# Altium PCB PCB.PcbDoc
Units mm, origin at the board's own origin, x right, y up, seen from the top; angles counter-clockwise.
Board outline 160 x 80 mm, 2 copper layers (Top Layer, Bottom Layer); 109 components, 85 nets, 468 pads, 1213 vias.
Unrouted connection lines stored in the file: 1.
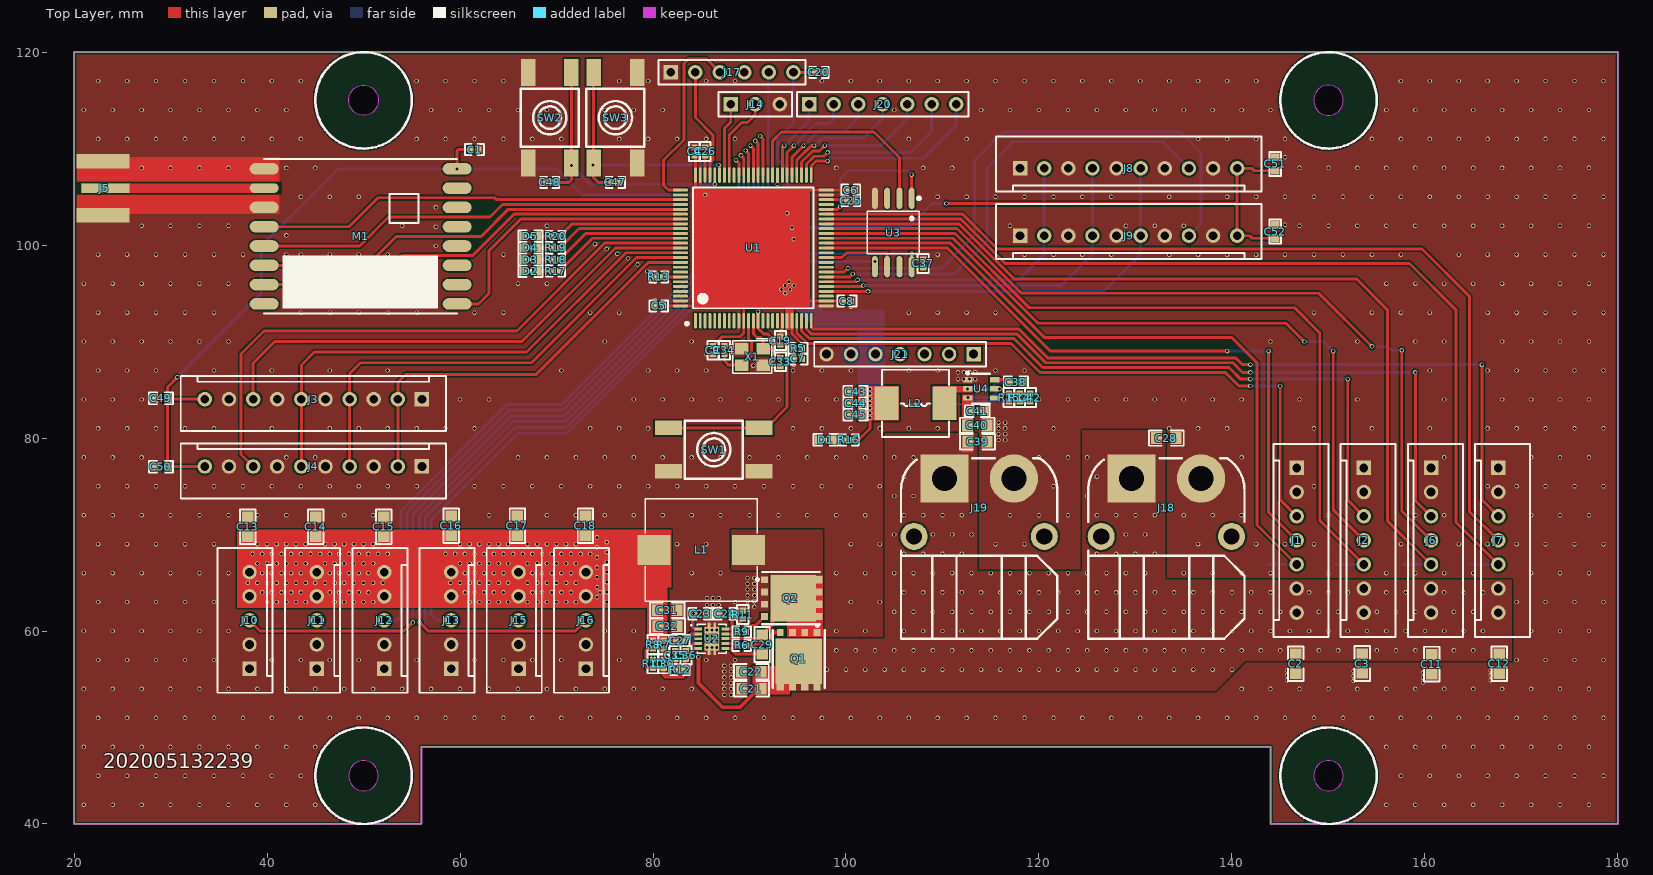
[diagram p0: Top Layer view]
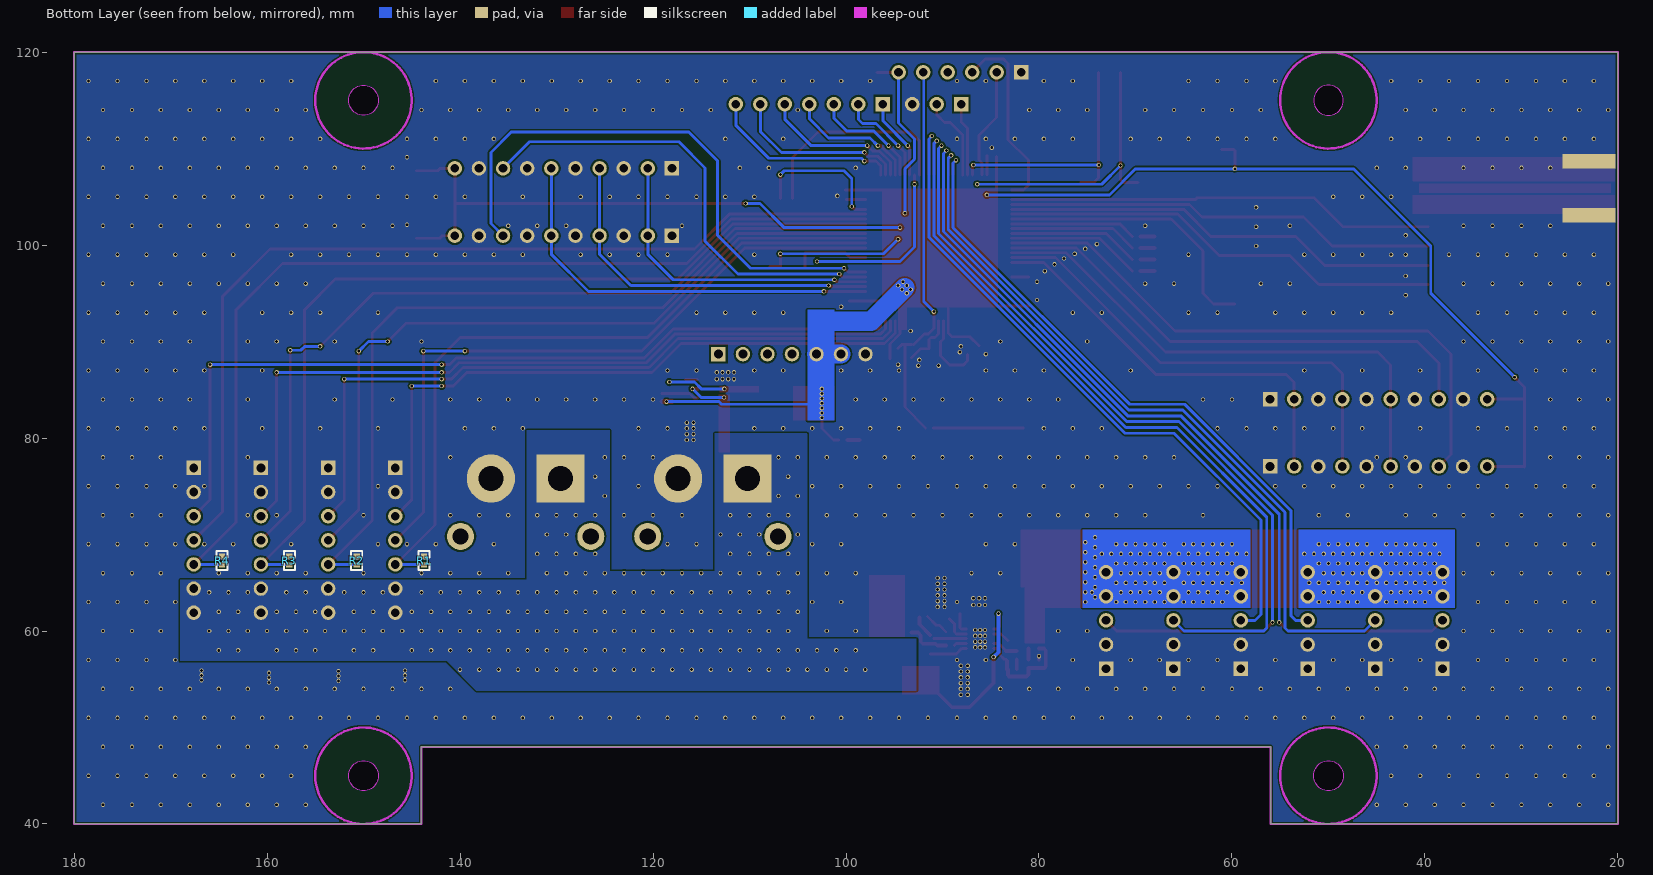
[diagram p1: Bottom Layer view, seen from below]

## Layer stack, top to bottom
Top Solder: solder mask 0.0102, Solder Resist, Dk 3.5
Top Layer: signal copper 0.0356
Dielectric 1: dielectric 0.32, FR-4, Dk 4.8
Bottom Layer: signal copper 0.0356
Bottom Solder: solder mask 0.0102, Solder Resist, Dk 3.5

## Board outline
20,40 20,120 180,120 180,40 144,40 144,48 56,48 56,40
cut-out: 148.45,45 ccw(c150,45) 150,43.45 ccw(c150,45) 151.55,45 ccw(c150,45) 150,46.55 ccw(c150,45)
cut-out: 148.45,115 ccw(c150,115) 150,113.45 ccw(c150,115) 151.55,115 ccw(c150,115) 150,116.55 ccw(c150,115)
cut-out: 48.45,45 ccw(c50,45) 50,43.45 ccw(c50,45) 51.55,45 ccw(c50,45) 50,46.55 ccw(c50,45)
cut-out: 50,113.45 cw(c50,115) 48.45,115 cw(c50,115) 50,116.55 cw(c50,115) 51.55,115 cw(c50,115)

## Design rules (kind name [scope] priority, off if disabled: settings)
AcuteAngle [All] p1: minimum=7.00000000000000E+0001 checktracksonly=FALSE
Clearance RF [InNetClass('RF') vs InNet('GND')] p1: gap=0.2
Clearance [All] p2: gap=0.15 except(0.1: Track-Track; 0.18: Arc-Via Via-Poly SMDPad-Via Track-Via Via-Fill THPad-Via Via-Via Via-Text; 0.2: THPad-Poly Arc-THPad THPad-Text SMDPad-THPad THPad-Fill Track-THPad THPad-THPad; 0.25: Region-Text; 0.5: Arc-Region Poly-Region THPad-Region Region-Region Text-Text Fill-Region SMDPad-Region Via-Region Track-Region)
ComponentClearance [All] p1: gap=0 collisioncheckmode=3 verticalgap=0 showdistances=FALSE
DiffPairsRouting [All] p1: maxlimit=0.254 minlimit=0.2 mostfreqgap=0.2 toplayer_minwidth=0.2 toplayer_maxwidth=0.381 toplayer_prefwidth=0.2 bottomlayer_minwidth=0.2 bottomlayer_maxwidth=0.381 bottomlayer_prefwidth=0.2 maxuncoupledlength=5
Height [All] p1: minheight=0 maxheight=254 prefheight=12.7
HoleSize [All] p1: absolutevalues=TRUE maxlimit=6.3 minlimit=0.2 maxpercent=80.000 minpercent=20.000
HoleToHoleClearance [All] p1: gap=0.2 allowstackedmicrovias=TRUE
MinimumSolderMaskSliver [All] p1: minsoldermaskwidth=0.089
PlaneConnect [All] p1: planeconnectstyle=Direct reliefexpansion=0.508 reliefentries=4 reliefconductorwidth=0.254 reliefairgap=0.254
PolygonConnect [All] p1: connectstyle=Direct reliefconductorwidth=0.254 reliefentries=4 polygonreliefangle="90 Angle" airgapwidth=0.254
RoutingVias [All] p1: holewidth=0.3 width=0.45 viastyle="Through Hole" minholewidth=0.3 minwidth=0.4 maxholewidth=0.711 maxwidth=1.27
SilkToBoardRegionClearance [All] p1 off:
SilkToSilkClearance [All] p1: silktosilkclearance=0
SilkToSolderMaskClearance [IsPad] p1: minsilkscreentomaskgap=0 clearancetoexposedcopper=TRUE
SolderMaskExpansion [All] p1: expansion=0.102
UnpouredPolygon [All] p1: allowunpoured=FALSE
UnpouredPolygon BoardOutlineClearance [All] p2: allowunpoured=FALSE
Width [All] p1: maxlimit=100 minlimit=0.13 preferedwidth=0.18
19 further rules are at their usual default settings.

## Classes and differential pairs
net class RF: NetJ5_1

## Components (designator, comment, footprint, x,y, rotation, side; value= is the part's Value field where it differs from the comment)
C1 "0.1uF" 0402 61.5,109.9 r180 top
C2 "10uF" 0805 146.6,56.6 r90 top
C3 "10uF" 0805 153.5,56.633 r90 top
C4 "0.1uF" 0402 84.3,109.7 r270 top
C5 "0.1uF" 0402 80.6,93.7 r0 top
C6 "0.1uF" 0402 100.5,105.7 r180 top
C7 "0.1uF" 0402 95.025,88.2 r0 top
C8 "0.1uF" 0402 100.1,94.2 r180 top
C9 "0.1uF" 0402 86.2,89.1 r90 top
C11 "10uF" 0805 160.7,56.567 r90 top
C12 "10uF" 0805 167.7,56.6 r90 top
C13 "10uF" 0805 38,70.8 r270 top
C14 "10uF" 0805 45.05,70.8 r270 top
C15 "10uF" 0805 52.1,70.8 r270 top
C16 "10uF" 0805 59.1,70.9 r270 top
C17 "10uF" 0805 65.95,70.9 r270 top
C18 "10uF" 0805 73,70.9 r270 top
C19 "0.1uF" 0402 93.2,90.1 r270 top
C20 "0.1uF" 0402 97.2,117.9 r0 top
C21 "10uF" 0805 90.2,54 r0 top
C22 "10uF" 0805 90.196,55.765 r0 top
C23 "1uF" 0603 84.9,61.8 r180 top
C24 "2.2uF" 0603 87.5,61.8 r180 top
C25 "2.2uF" 0402 100.5,104.6 r180 top
C26 "2.2uF" 0402 85.4,109.7 r270 top
C27 "3.3nF" 0402 82.8,59 r180 top
C28 "10uF" 0805 133.2,80 r0 top
C29 "0.1uF" 0805 91.3,58.6 r90 top
C30 "1nF" 0402 81.1,56.6 r270 top
C31 "10uF" 0805 81.481,62.15 r0 top
C32 "10uF" 0805 81.5,60.5 r0 top
C33 "10pF" 0402 93.2,87.9 r270 top
C34 "10pF" 0402 87.4,89.1 r270 top
C35 "6.8nF" 0402 82.3,57.5 r270 top
C36 "150pF" 0402 83.4,57.5 r270 top
C37 "0.1uF" 0402 108,98.1 r90 top
C38 "0.1uF" 0603 117.6,85.8 r180 top
C39 "10uF" 0805 113.629,79.614 r180 top
C40 "10uF" 0805 113.6,81.3 r180 top
C41 "0.1uF" 0603 113.6,82.8 r0 top
C42 "NC" 0402 119.1,84.2 r270 top
C43 "22uF" 0603 101,84.8 r0 top
C44 "22uF" 0603 101,83.6 r0 top
C45 "22uF" 0603 101,82.4 r0 top
C47 "0.1uF" 0402 76.1,106.5 r0 top
C48 "0.1uF" 0402 69.3,106.5 r180 top
C49 "10uF" 0603 29,84.1 r0 top
C50 "10uF" 0603 29,77 r0 top
C51 "10uF" 0603 144.5,108.4 r270 top
C52 "10uF" 0603 144.5,101.4 r270 top
D1 "LED" 0603LED 97.9,79.8 r180 top
D2 "LED" 0603LED 67.3,97.3 r180 top
D3 "LED" 0603LED 67.3,98.5 r180 top
D4 "LED" 0603LED 67.3,99.7 r180 top
D5 "LED" 0603LED 67.3,100.9 r180 top
J1 "XH_7P" XH_7P直插立式 146.7,69.4 r270 top
J2 "XH_7P" XH_7P直插立式 153.667,69.4 r270 top
J3 "XH_10P" XH_10P直插立式 44.805,84.034 r180 top
J4 "XH_10P" XH_10P直插立式 44.805,77.051 r180 top
J5 "SMA" SMA_Edge 23.4,105.9 r0 top
J6 "XH_7P" XH_7P直插立式 160.633,69.4 r270 top
J7 "XH_7P" XH_7P直插立式 167.6,69.4 r270 top
J8 "XH_10P" XH_10P直插立式 129.29,107.949 r0 top
J9 "XH_10P" XH_10P直插立式 129.29,100.966 r0 top
J10 "XH_5P" XH_5P直插立式 38.183,61.1 r90 top
J11 "XH_5P" XH_5P直插立式 45.166,61.1 r90 top
J12 "XH_5P" XH_5P直插立式 52.149,61.1 r90 top
J13 "XH_5P" XH_5P直插立式 59.083,61.1 r90 top
J14 "2.54_1x3P" 2.54排针_1x3立式 90.6,114.6 r0 top
J15 "XH_5P" XH_5P直插立式 66.066,61.1 r90 top
J16 "XH_5P" XH_5P直插立式 73.049,61.1 r90 top
J17 "2.54_1x6P" 2.54排针_1x6立式 88.2,117.9 r0 top
J18 "XT60PW-M" XT60PW-M20 133.2,72.8 r0 top
J19 "XT60PW-M" XT60PW-M20 113.8,72.8 r0 top
J20 "2.54_1x7P" 2.54排针_1x7立式 103.8,114.6 r0 top
J21 "2.54_1x7P" 2.54排针_1x7立式 105.6,88.7 r180 top
L1 "1uH" IND-SMD_L11.5-W10.5_1004 85,68.4 r0 top
L2 "1.5uH" IND-SMD_L7.1-W6.6_0630 107.2,83.6 r180 top
M1 "RFM69H" RFM69H 49.7,100.9 r0 top
Q1 "CSD17581Q5A" SON-8_L5.0-W6.0-P1.27-BL_MOSFET 95.1,57.1 r180 top
Q2 "CSD17581Q5A" SON-8_L5.0-W6.0-P1.27-BL_MOSFET 94.3,63.4 r270 top
R1 "10k" 0402 143.733,67.3 r90 bottom
R2 "10k" 0402 150.711,67.3 r90 bottom
R3 "10k" 0402 157.689,67.3 r90 bottom
R4 "10k" 0402 164.667,67.3 r90 bottom
R5 "10k" 0402 95.025,89.3 r0 top
R6 "0" 0402 89.2,58.5 r0 top
R7 "237" 0402 81.1,58.6 r90 top
R8 "10k" 0402 80,58.6 r90 top
R9 "0" 0402 89.2,59.9 r0 top
R10 "887" 0402 80,56.6 r270 top
R11 "7.15k" 0402 89.3,61.7 r270 top
R12 "1.54k" 0402 82.8,56 r180 top
R13 "10k" 0402 80.6,96.7 r0 top
R14 "45.3k" 0402 118,84.2 r270 top
R15 "10k" 0402 116.9,84.2 r90 top
R16 "1k" 0402 100.3,79.8 r0 top
R17 "1k" 0402 69.9,97.3 r0 top
R18 "1k" 0402 69.9,98.5 r0 top
R19 "1k" 0402 69.9,99.7 r0 top
R20 "1k" 0402 69.9,100.9 r0 top
SW1 "Button" KEY-SMD_4P-L6.0-W6.0-P4.50-LS8.6 86.3,78.8 r0 top
SW2 "Button" KEY-SMD_4P-L6.0-W6.0-P4.50-LS8.6 69.3,113.2 r270 top
SW3 "Button" KEY-SMD_4P-L6.0-W6.0-P4.50-LS8.6 76.1,113.2 r90 top
U1 "STM32H750VBT6" LQFP-100_L14.0-W14.0-P0.50-LS16.0-BL 90.4,99.7 r0 top
U2 "TPS40305DRCR" VSON-10_L3.0-W3.0-P0.50-TL-EP 86.1,59.2 r0 top
U3 "W25Q64JVSSIQ" SOP-8_L5.3-W5.3-P1.27-LS8.0-BL 104.9,101.3 r180 top
U4 "TPS563240" SOT-23-6_L2.9-W1.6-P0.95-LS2.8-BR 114,85.1 r180 top
X1 "8MHz" OSC-SMD_4P-L3.2-W2.5-BL 90.3,88.4 r180 top

## Footprints (in the part's own frame and the unit in brackets; to place one, negate y for a bottom-side part, rotate by r counter-clockwise, add the part's x,y. Pads: shape width x height; smd on the part's side, far side on the other; paste and mask are expansions set on the pad)
2.54排针_1x3立式 [mm]
  rect 1.5x1.5 hole 0.9: 1(-2.54,0)
  round 1.5 hole 0.9: 2(0,0) 3(2.54,0)
  silkscreen extent -3.81,-1.27 3.81,1.27
2.54排针_1x6立式 [mm]
  rect 1.5x1.5 hole 0.9: 1(-6.35,0)
  round 1.5 hole 0.9: 2(-3.81,0) 3(-1.27,0) 4(1.27,0) 5(3.81,0) 6(6.35,0)
  silkscreen extent -7.62,-1.27 7.62,1.27
2.54排针_1x7立式 [mm]
  rect 1.5x1.5 hole 0.9: 1(-7.62,0)
  round 1.5 hole 0.9: 2(-5.08,0) 3(-2.54,0) 4(0,0) 5(2.54,0) 6(5.08,0) 7(7.62,0)
  silkscreen extent -8.89,-1.27 8.89,1.27
0402 [mm]
  rect 0.6x0.65 smd mask+0.051: 1(-0.425,0) 2(0.425,0)
  silkscreen extent -0.97,-0.57 0.98,0.58
0603 [mm] "0603 1.6x0.8mm"
  rect 0.8x0.9 smd: 1(-0.7,0) 2(0.7,0)
  silkscreen extent -1.25,-0.6 1.25,0.6
0603LED [mm] "0603 1.6x0.8mm"
  rect 0.8x0.9 smd: A(-0.7,0) K(0.7,0)
  silkscreen extent -1.25,-0.6 1.25,0.6
0805 [mm]
  rect 1.14x1.2 smd: 1(-1,0) 2(1,0)
  silkscreen extent -1.8,-0.8 1.8,0.8
IND-SMD_L7.1-W6.6_0630 [mm] "0630 Inductor 6.6x6.6mm"
  rect 2.5x3.5 smd: 1(-3,0) 2(3,0)
  silkscreen extent -3.47,-3.47 3.47,3.47
IND-SMD_L11.5-W10.5_1004 [mm]
  rect 3.424x3.12 smd: 1(4.878,0) 2(-4.878,0)
  silkscreen extent -5.83,-5.33 5.83,5.33
KEY-SMD_4P-L6.0-W6.0-P4.50-LS8.6 [mm]
  rect 2.8x1.5 smd: 1(-4.7,2.25) 1(4.7,2.25) 2(-4.7,-2.25) 2(4.7,-2.25)
  silkscreen extent -3,-3 3,3
LQFP-100_L14.0-W14.0-P0.50-LS16.0-BL [mm]
  oval 0.3x1.6 smd: 1(-6,-7.55) 2(-5.5,-7.55) 3(-5,-7.55) 4(-4.5,-7.55) 5(-4,-7.55) 6(-3.5,-7.55) 7(-3,-7.55) 8(-2.5,-7.55) 9(-2,-7.55) 10(-1.5,-7.55) 11(-1,-7.55) 12(-0.5,-7.55) 13(0,-7.55) 14(0.5,-7.55) 15(1,-7.55) 16(1.5,-7.55) 17(2,-7.55) 18(2.5,-7.55) 19(3,-7.55) 20(3.5,-7.55) 21(4,-7.55) 22(4.5,-7.55) 23(5,-7.55) 24(5.5,-7.55) 25(6,-7.55) 51(6,7.55) 52(5.5,7.55) 53(5,7.55) 54(4.5,7.55) 55(4,7.55) 56(3.5,7.55) 57(3,7.55) 58(2.5,7.55) 59(2,7.55) 60(1.5,7.55) 61(1,7.55) 62(0.5,7.55) 63(0,7.55) 64(-0.5,7.55) 65(-1,7.55) 66(-1.5,7.55) 67(-2,7.55) 68(-2.5,7.55) 69(-3,7.55) 70(-3.5,7.55) 71(-4,7.55) 72(-4.5,7.55) 73(-5,7.55) 74(-5.5,7.55) 75(-6,7.55)
  oval 1.6x0.3 smd: 26(7.55,-6) 27(7.55,-5.5) 28(7.55,-5) 29(7.55,-4.5) 30(7.55,-4) 31(7.55,-3.5) 32(7.55,-3) 33(7.55,-2.5) 34(7.55,-2) 35(7.55,-1.5) 36(7.55,-1) 37(7.55,-0.5) 38(7.55,0) 39(7.55,0.5) 40(7.55,1) 41(7.55,1.5) 42(7.55,2) 43(7.55,2.5) 44(7.55,3) 45(7.55,3.5) 46(7.55,4) 47(7.55,4.5) 48(7.55,5) 49(7.55,5.5) 50(7.55,6) 76(-7.55,6) 77(-7.55,5.5) 78(-7.55,5) 79(-7.55,4.5) 80(-7.55,4) 81(-7.55,3.5) 82(-7.55,3) 83(-7.55,2.5) 84(-7.55,2) 85(-7.55,1.5) 86(-7.55,1) 87(-7.55,0.5) 88(-7.55,0) 89(-7.55,-0.5) 90(-7.55,-1) 91(-7.55,-1.5) 92(-7.55,-2) 93(-7.55,-2.5) 94(-7.55,-3) 95(-7.55,-3.5) 96(-7.55,-4) 97(-7.55,-4.5) 98(-7.55,-5) 99(-7.55,-5.5) 100(-7.55,-6)
  silkscreen extent -7.03,-8 6.25,6.25
OSC-SMD_4P-L3.2-W2.5-BL [mm]
  rect 1.4x1.2 smd: 1(-1.1,-0.85) 2(1.1,-0.85) 3(1.1,0.85) 4(-1.1,0.85)
  silkscreen extent -2.26,-1.91 2.03,1.68
RFM69H [mm]
  oval 3x1.2 smd: 1(-10,7) 3(-10,3) 4(-10,1) 5(-10,-1) 6(-10,-3) 7(-10,-5) 8(-10,-7) 9(10,-7) 10(10,-5) 11(10,-3) 12(10,-1) 13(10,1) 14(10,3) 15(10,5) 16(10,7)
  oval 3x1 smd: 2(-10,5)
  silkscreen extent -10,-8 10,8
SMA_Edge [mm]
  rect 5x1 smd mask+0: 1(-0.147,0)
  rect 5.5x1.5 smd mask+0: 2(-0.397,-2.8) 2(-0.397,2.8)
  rect 5.5x1.5 smd far side mask+0: 2(-0.397,-2.8) 2(-0.397,2.8)
SON-8_L5.0-W6.0-P1.27-BL_MOSFET [mm]
  rect 0.7x0.75 smd: 1(-1.905,-2.755) 1(-0.635,-2.755) 1(0.635,-2.755) 2(1.905,-2.755)
  rect 0.749x1 smd: 3(-1.905,2.755) 3(-0.635,2.755) 3(0.635,2.755) 3(1.905,2.755)
  rect 4.801x4.699 smd: 3(0,0.241)
  silkscreen extent -2.72,-3.61 2.69,3
SOP-8_L5.3-W5.3-P1.27-LS8.0-BL [mm]
  oval 0.609x2.204 smd: 1(-1.905,-3.542) 2(-0.635,-3.542) 3(0.635,-3.542) 4(1.905,-3.542) 5(1.905,3.542) 6(0.635,3.542) 7(-0.635,3.542) 8(-1.905,3.542)
  silkscreen extent -2.81,-3.69 2.69,2.21
SOT-23-6_L2.9-W1.6-P0.95-LS2.8-BR [mm]
  rect 1x0.55 smd: 1(1.4,-0.95) 2(1.4,0) 3(1.4,0.95) 4(-1.4,0.95) 5(-1.4,0) 6(-1.4,-0.95)
  silkscreen extent -0.9,-1.78 1.52,1.55
VSON-10_L3.0-W3.0-P0.50-TL-EP [mm]
  rect 0.8x0.3 smd: 1(-1.399,0.996) 2(-1.399,0.496) 3(-1.399,-0.004) 4(-1.399,-0.504) 5(-1.399,-1.004) 6(1.398,-0.996) 7(1.398,-0.496) 8(1.398,0.004) 9(1.398,0.504) 10(1.398,1.004)
  rect 0.3x0.8 smd: 11(-0.3,-1.3) 11(-0.3,1.3) 11(0.3,-1.3) 11(0.3,1.3)
  rect 1.52x2.4 smd: 11(0,0)
  round 0 smd: 11(0.001,-0.009)
  silkscreen extent -2.21,-1.5 1.5,1.5
XH_5P直插立式 [mm]
  rect 1.5x1.5 hole 0.9: 1(-5,0)
  round 1.5 hole 0.9: 2(-2.5,0) 3(0,0) 4(2.5,0) 5(5,0)
  silkscreen extent -7.5,-2.4 7.5,3.3
XH_7P直插立式 [mm]
  rect 1.5x1.5 hole 0.9: 1(-7.5,0)
  round 1.5 hole 0.9: 2(-5,0) 3(-2.5,0) 4(0,0) 5(2.5,0) 6(5,0) 7(7.5,0)
  silkscreen extent -10,-2.4 10,3.3
XH_10P直插立式 [mm]
  rect 1.5x1.5 hole 0.9: 1(-11.25,0)
  round 1.5 hole 0.9: 2(-8.75,0) 3(-6.25,0) 4(-3.75,0) 5(-1.25,0) 6(1.25,0) 7(3.75,0) 8(6.25,0) 9(8.75,0) 10(11.25,0)
  silkscreen extent -13.75,-2.4 13.75,3.3
XT60PW-M20 [mm] "长：18.8mm， 宽：16mm，高：8.6mm"
  round 2.8 hole 1.7: 0(-6.75,-3) 0(6.75,-3)
  rect 5x5 hole 2.6: 1(-3.6,3)
  round 5 hole 2.6: 2(3.6,3)
  silkscreen extent -8.1,-13.6 8.1,5.1, body extent -8,-13.6 8,5.02, height 8.65

## Part data
C1 C2 C3 C4 C5 C6 C7 C8 C9 C11 C12 C13 C14 C15 C16 C17 C18 C19 C20 C21 C22 C23 C24 C25 C26 C27 C28 C29 C30 C31 C32 C33 C34 C35 C36 C37 C38 C39 C40 C41 C42 C43 C44 C45 C47 C48 C49 C50 C51 C52: library part Cap
J5: library part Coax
L1 L2: library part Inductor, "Inductor"
Q1 Q2: library part MOS_N_SON8
R1 R2 R3 R4 R5 R6 R7 R8 R9 R10 R11 R12 R13 R14 R15 R16 R17 R18 R19 R20: library part Res, "Resistor"
X1: library part Crystal_4P

## Via types
v1: diameter 0.45, hole 0.3, Top Layer to Bottom Layer, tented both sides, 1213 vias

## Nets (pads, with @x,y where several pads share a name; then routed paths per layer and width w, separated by ;. In a path a pad name is that pad's centre, name@x,y a point inside that pad or via, vN(x,y) a via of type N, cw(c..) or ccw(c..) an arc to the next point about the centre after c; other vN are vias at no path point)
3V3: C1.2 C4.2 C5.2 C6.2 C7.2 C8.2 C9.2 C20.1 C37.1 C42.2 C43.2 C44.2 C45.2 C49.2 C50.2 C51.2 C52.2 J3.10 J4.10 J8.10 J9.10 J17.6 J21.5 J21.6 L2.2 M1.16 R5.2 R14.2 R16.2 U1.11 U1.20 U1.21 U1.27 U1.50 U1.75 U1.100 U3.8 | length 289.8
  Top Layer w0.3: C50.2 C49.2 29.7,85.3 v1(30.7,86.3) ; C50.2@29.751,77.051 J4.10 ; C49.2@29.766,84.034 J3.10 ; v1(59.7,107.9) 59.7,109.8 59.8,109.9 C1.2 ; C5.2 U1.100 96.1,93.7 96.1,105.7 ; 84.4,93.7 84.4,105.7 ; C4.2@84.4,109.175 84.4,105.7 ; C9.2 87.175,90.5 89,90.5 89.4,90.9 U1.11 89.4,93.7 ; U1.21 94.4,90.8 95.45,89.75 R5.2 C7.2 ; J17.6 C20.1 ; 96.1,94.2 U1.27 C8.2 ; C6.2 U1.50 84.4,105.7 ; R16.2 101.3,79.8 102.5,81 v1(102.5,82.1) ; v1(106.8,99.1) 106.805,99.095 U3.8 C37.1@107.883,97.758 ; v1(110.4,104.3) 140.54,104.3 ; C52.2 142.1,100.7 141.834,100.966 J9.10 140.54,104.3 ; C51.2 142.3,107.7 142.051,107.949 J8.10 140.54,104.3
  Top Layer w0.5: R14.2 C42.2
  Bottom Layer w0.3: v1(30.7,86.3) 39.4,95 39.4,99.9 47.4,107.9 70,107.9 72.7,105.2 v1(85.4,105.2) ; v1(93.9,103.3) 93.9,107.9 92.9,108.9 92.9,111 94.55,112.65 J17.6 ; v1(94.4,101.8) 106.4,101.8 108.9,104.3 v1(110.4,104.3) ; v1(94.6,100.6) 96.1,99.1 v1(106.8,99.1) ; v1@102.5,83.5 112.9,83.5 113.175,83.775 v1(118.6,83.775)
  Bottom Layer w2: 93.9,95.6 97.4,92.1 102.6,92.1 ; J21.6 J21.5
  other v1: 102.5,82.6 102.5,83.1 102.5,83.6 102.5,84.1 102.5,84.6 102.5,85.1 93.7,95 93.3,95.4 94.2,95.4 93.7,95.8 94.6,95.8 94.1,96.2
7V4: C13.2 C14.2 C15.2 C16.2 C17.2 C18.2 C31.1 C32.1 J10.4 J10.5 J11.4 J11.5 J12.4 J12.5 J13.4 J13.5 J15.4 J15.5 J16.4 J16.5 L1.2 R7.2 R8.2
  other v1: 40,63 41,63 42,63 43,63 44,63 47,63 48,63 49,63 50,63 51,63 61,63 62,63 63,63 64,63 65,63 67,63 68,63 69,63 70,63 71,63 72,63 75.2,63 74.2,63.5 39.5,64 40.5,64 41.5,64 42.5,64 43.5,64 46.5,64 47.5,64 48.5,64 49.5,64 50.5,64 60.5,64 61.5,64 62.5,64 63.5,64 64.5,64 67.5,64 68.5,64 69.5,64 70.5,64 71.5,64 74.5,64 75.2,64.033 74.2,64.533 38,65 39,65 40,65 41,65 42,65 43,65 44,65 45,65 46,65 47,65 48,65 49,65 50,65 51,65 52,65 59,65 60,65 61,65 62,65 63,65 64,65 65,65 67,65 68,65 69,65 70,65 71,65 72,65 75.2,65.067 74.2,65.567 39.5,66 40.5,66 41.5,66 42.5,66 43.5,66 46.5,66 47.5,66 48.5,66 49.5,66 50.5,66 60.5,66 61.5,66 62.5,66 63.5,66 64.5,66 67.5,66 68.5,66 69.5,66 70.5,66 71.5,66 75.2,66.1 74.2,66.6 39,67 40,67 41,67 42,67 43,67 44,67 46,67 47,67 48,67 49,67 50,67 51,67 60,67 61,67 62,67 63,67 64,67 65,67 67,67 68,67 69,67 70,67 71,67 72,67 75.2,67.133 74.2,67.633 38.5,68 39.5,68 40.5,68 41.5,68 42.5,68 43.5,68 44.5,68 45.5,68 46.5,68 47.5,68 48.5,68 49.5,68 50.5,68 51.5,68 52.5,68 58.5,68 59.5,68 60.5,68 61.5,68 62.5,68 63.5,68 64.5,68 65.5,68 66.5,68 67.5,68 68.5,68 69.5,68 70.5,68 71.5,68 72.5,68 73.5,68 75.2,68.167 74.2,68.667 39,69 40,69 41,69 42,69 43,69 44,69 46,69 47,69 48,69 49,69 50,69 51,69 60,69 61,69 62,69 63,69 64,69 65,69 67,69 68,69 69,69 70,69 71,69 72,69 75.2,69.2 74.2,69.7
BAT_PWR: C2.2 C3.2 C11.2 C12.2 C21.2 C22.2 C23.2 C28.1 C39.2 C40.2 C41.1 J1.6 J1.7 J2.6 J2.7 J6.6 J6.7 J7.6 J7.7 J18.1 J19.1 Q1.3 U2.1 U4.3 U4.5 | length 21.1
  Top Layer w0.3: v1(84.2,61.8) 84.104,61.704 84.104,60.396 84.304,60.196 U2.1
  Top Layer w0.4: v1(84.7,57.3) 84.7,54.6 87.2,52.1 89,52.1 90.5,53.6 ; U4.5 v1(115.9,85.1)
  Bottom Layer w0.3: v1(112.65,84.2) 115,84.2 v1(115.9,85.1)
  Bottom Layer w0.4: v1(84.2,61.8) 84.2,57.8 v1(84.7,57.3)
  other v1: 98,56 100,56 102,56 104,56 106,56 108,56 110,56 112,56 114,56 116,56 118,56 120,56 122,56 124,56 126,56 128,56 130,56 132,56 134,56 136,56 138,56 140,56 99,58 101,58 103,58 105,58 107,58 109,58 111,58 113,58 115,58 117,58 119,58 121,58 123,58 125,58 127,58 129,58 131,58 133,58 135,58 137,58 139,58 141,58 143,58 145,58 149,58 151,58 155,58 157,58 159,58 163,58 165,58 106,60 108,60 110,60 112,60 114,60 116,60 118,60 120,60 122,60 124,60 126,60 128,60 130,60 132,60 134,60 136,60 138,60 140,60 142,60 144,60 146,60 148,60 150,60 152,60 154,60 156,60 158,60 160,60 162,60 164,60 166,60 105,62 107,62 109,62 111,62 113,62 115,62 117,62 119,62 121,62 123,62 125,62 127,62 129,62 131,62 133,62 135,62 137,62 139,62 141,62 143,62 145,62 149,62 151,62 155,62 157,62 159,62 163,62 165,62 106,64 108,64 110,64 112,64 114,64 116,64 118,64 120,64 122,64 124,64 126,64 128,64 130,64 132,64 134,64 136,64 138,64 140,64 142,64 144,64 148,64 150,64 152,64 156,64 158,64 162,64 164,64 166,64 105,66 107,66 109,66 111,66 113,66 115,66 117,66 119,66 121,66 123,66 125,66 127,66 129,66 131,66 106,68 108,68 110,68 112,68 126,68 128,68 130,68 132,68 105,70 109,70 111,70 113,70 129,70 131,70 106,72 108,72 110,72 112,72 126,72 128,72 130,72 132,72 105,74 107,74 125,74 106,76 126,76 105,78 107,78 125,78
DEBUG_JTCK-SWCLK: J17.3 U1.76 | length 19.9
  Top Layer w0.3: U1.76 81.6,105.7 81.1,106.2 81.1,108.8 83.2,110.9 83.2,118.8 83.7,119.3 85.53,119.3 J17.3
DEBUG_JTMS-SWDIO: J17.2 U1.72 | length 11.5
  Top Layer w0.3: J17.2 84.39,113.21 86.2,111.4 86.2,108.8 85.9,108.5 U1.72
DIR_FL: J1.4 U1.38 | length 71.1
  Top Layer w0.3: U1.38 110.5,99.7 121.2,89 v1(139.5,89) ; v1(143.8,89) 143.8,72.3 J1.4
  Bottom Layer w0.3: v1(139.5,89) v1(143.8,89)
DIR_FR: J2.4 U1.40 | length 78.3
  Top Layer w0.3: U1.40 111.1,100.7 119.9,91.9 145.6,91.9 v1(147.5,90) ; v1(150.5,89) 150.5,72.567 J2.4
  Bottom Layer w0.3: v1(147.5,90) 149.5,90 v1(150.5,89)
DIR_RL: J6.4 U1.42 | length 85.8
  Top Layer w0.3: U1.42 111.5,101.7 118.2,95 149,95 v1(154.5,89.5) ; v1(157.6,89.1) 157.6,72.433 J6.4
  Bottom Layer w0.3: v1(154.5,89.5) 156.1,89.5 156.5,89.1 v1(157.6,89.1)
DIR_RR: J7.4 U1.45 | length 96.7
  Top Layer w0.3: U1.45 112.1,103.2 115.7,99.6 159.7,99.6 164.6,94.7 164.6,72.4 J7.4
GND: C1.1 C2.1 C3.1 C4.1 C5.1 C6.1 C7.1 C8.1 C9.1 C11.1 C12.1 C13.1 C14.1 C15.1 C16.1 C17.1 C18.1 C19.1 C20.2 C21.1 C22.1 C23.1 C24.2 C25.1 C26.1 C27.2 C28.2 C31.2 C32.2 C33.2 C34.1 C37.2 C39.1 C40.1 C41.2 C43.1 C44.1 C45.1 C47.2 C48.2 C49.1 C50.1 C51.1 C52.1 D1.K D2.K D3.K D4.K D5.K J1.1 J1.2 J2.1 J2.2 J3.1 J3.3 J3.5 J3.7 J3.9 J4.1 J4.3 J4.5 J4.7 J4.9 J5.2 J6.1 J6.2 J7.1 J7.2 J8.1 J8.3 J8.5 J8.7 J8.9 J9.1 J9.3 J9.5 J9.7 J9.9 J10.1 J10.2 J11.1 J11.2 J12.1 J12.2 J13.1 J13.2 J14.3 J15.1 J15.2 J16.1 J16.2 J17.1 J18.2 J19.2 J21.7 M1.1 M1.3 Q2.1 R1.2 R2.2 R3.2 R4.2 R10.1 R11.1 R13.1 R15.1 SW1.2 SW2.2 SW3.2 U1.10 U1.19 U1.26 U1.49 U1.74 U1.99 U2.11 U3.4 U4.1 X1.2 X1.4 | length 0.4
  Top Layer w0.4: R10.1 v1(80,57.4)
  other v1: 21,42 24,42 27,42 30,42 33,42 36,42 39,42 42,42 45,42 156,42 159,42 162,42 165,42 168,42 171,42 174,42 177,42 22.5,45 25.5,45 28.5,45 31.5,45 34.5,45 37.5,45 40.5,45 43.5,45 157.5,45 160.5,45 163.5,45 166.5,45 169.5,45 172.5,45 175.5,45 178.5,45 21,48 24,48 27,48 30,48 33,48 36,48 39,48 42,48 45,48 156,48 159,48 162,48 165,48 168,48 171,48 174,48 177,48 22.5,51 25.5,51 28.5,51 31.5,51 34.5,51 37.5,51 40.5,51 43.5,51 46.5,51 49.5,51 52.5,51 55.5,51 58.5,51 61.5,51 64.5,51 67.5,51 70.5,51 73.5,51 76.5,51 79.5,51 82.5,51 85.5,51 88.5,51 91.5,51 94.5,51 97.5,51 100.5,51 103.5,51 106.5,51 109.5,51 112.5,51 115.5,51 118.5,51 121.5,51 124.5,51 127.5,51 130.5,51 133.5,51 136.5,51 139.5,51 142.5,51 145.5,51 148.5,51 151.5,51 154.5,51 157.5,51 160.5,51 163.5,51 166.5,51 169.5,51 172.5,51 175.5,51 178.5,51 87.4,53.4 88.1,53.4 21,54 24,54 27,54 30,54 33,54 36,54 39,54 42,54 45,54 48,54 51,54 54,54 57,54 60,54 63,54 66,54 69,54 72,54 75,54 78,54 81,54 84,54 87.4,54 88.1,54 141,54 144,54 147,54 150,54 153,54 156,54 159,54 162,54 165,54 168,54 171,54 174,54 177,54 87.4,54.6 88.1,54.6 159.8,54.667 152.6,54.833 145.7,54.9 166.8,54.9 159.8,55.167 87.4,55.2 88.1,55.2 152.6,55.333 145.7,55.4 166.8,55.4 159.8,55.667 87.4,55.8 88.1,55.8 152.6,55.833 145.7,55.9 166.8,55.9 87.4,56.4 88.1,56.4 22.5,57 25.5,57 28.5,57 31.5,57 34.5,57 40.5,57 43.5,57 46.5,57 49.5,57 55.5,57 61.5,57 64.5,57 67.5,57 70.5,57 76.5,57 85.5,57 88.5,57 169.5,57 172.5,57 175.5,57 178.5,57 85.6,58.3 86.1,58.3 86.6,58.3 85.6,58.9 86.1,58.9 86.6,58.9 85.6,59.5 86.1,59.5 86.6,59.5 21,60 24,60 27,60 30,60 33,60 36,60 75,60 78,60 99,60 102,60 171,60 174,60 177,60 85.6,60.1 86.1,60.1 86.6,60.1 89.8,62.5 90.5,62.5 85.6,62.7 86.2,62.7 86.8,62.7 22.5,63 25.5,63 28.5,63 31.5,63 34.5,63 88.5,63 100.5,63 103.5,63 169.5,63 172.5,63 175.5,63 178.5,63 89.8,63.1 90.5,63.1 85.6,63.4 86.2,63.4 86.8,63.4 89.8,63.7 90.5,63.7 89.8,64.3 90.5,64.3 89.8,64.9 90.5,64.9 89.8,65.5 90.5,65.5 21,66 24,66 27,66 30,66 33,66 36,66 84,66 87,66 99,66 102,66 135,66 138,66 141,66 144,66 150,66 156,66 159,66 162,66 165,66 171,66 174,66 177,66 22.5,69 25.5,69 28.5,69 31.5,69 34.5,69 82.5,69 85.5,69 100.5,69 103.5,69 115.5,69 118.5,69 136.5,69 142.5,69 145.5,69 148.5,69 157.5,69 163.5,69 166.5,69 169.5,69 172.5,69 175.5,69 178.5,69 21,72 24,72 27,72 30,72 33,72 36,72 39,72 42,72 48,72 51,72 63,72 69,72 72,72 75,72 78,72 81,72 84,72 87,72 90,72 93,72 96,72 99,72 102,72 117,72 120,72 123,72 135,72 138,72 141,72 150,72 159,72 162,72 171,72 174,72 177,72 22.5,75 25.5,75 28.5,75 31.5,75 34.5,75 37.5,75 40.5,75 43.5,75 46.5,75 49.5,75 52.5,75 55.5,75 61.5,75 64.5,75 67.5,75 70.5,75 73.5,75 76.5,75 79.5,75 82.5,75 85.5,75 88.5,75 91.5,75 94.5,75 97.5,75 100.5,75 103.5,75 121.5,75 148.5,75 166.5,75 169.5,75 172.5,75 175.5,75 178.5,75 21,78 24,78 27,78 42,78 45,78 66,78 69,78 72,78 75,78 78,78 81,78 84,78 87,78 90,78 93,78 96,78 99,78 102,78 120,78 123,78 141,78 162,78 171,78 174,78 177,78 115.8,79.8 116.5,79.8 115.8,80.4 116.5,80.4 22.5,81 25.5,81 28.5,81 31.5,81 34.5,81 40.5,81 46.5,81 49.5,81 52.5,81 55.5,81 58.5,81 61.5,81 73.5,81 76.5,81 79.5,81 94.5,81 97.5,81 100.5,81 103.5,81 106.5,81 109.5,81 115.8,81 116.5,81 118.5,81 121.5,81 133.5,81 136.5,81 139.5,81 148.5,81 154.5,81 160.5,81 166.5,81 169.5,81 172.5,81 175.5,81 178.5,81 115.8,81.6 116.5,81.6 21,84 24,84 27,84 60,84 63,84 78,84 81,84 84,84 87,84 90,84 93,84 96,84 99,84 120,84 123,84 126,84 129,84 132,84 135,84 138,84 141,84 147,84 153,84 162,84 168,84 171,84 174,84 177,84 111.6,86.1 112.2,86.1 112.8,86.1 113.4,86.1 111.6,86.8 112.2,86.8 112.8,86.8 113.4,86.8 22.5,87 25.5,87 28.5,87 34.5,87 40.5,87 46.5,87 52.5,87 70.5,87 79.5,87 82.5,87 85.5,87 94.5,87 97.5,87 100.5,87 106.5,87 109.5,87 115.5,87 118.5,87 160.5,87 166.5,87 169.5,87 172.5,87 175.5,87 178.5,87 90.4,87.5 92.5,87.5 94.6,87.6 92.4,88.1 85.5,88.7 88.2,88.9 88.1,89.5 21,90 24,90 27,90 30,90 33,90 36,90 75,90 84,90 144,90 153,90 159,90 162,90 168,90 171,90 174,90 177,90 93.3,91.1 22.5,93 25.5,93 28.5,93 31.5,93 34.5,93 43.5,93 46.5,93 49.5,93 52.5,93 55.5,93 61.5,93 64.5,93 73.5,93 76.5,93 106.5,93 109.5,93 112.5,93 115.5,93 148.5,93 154.5,93 157.5,93 160.5,93 166.5,93 169.5,93 172.5,93 175.5,93 178.5,93 100.5,93.6 80.2,94.3 42,94.8 21,96 24,96 27,96 30,96 33,96 36,96 54,96 57,96 66,96 69,96 156,96 159,96 162,96 165,96 168,96 171,96 174,96 177,96 80.2,96.2 42,96.8 79.4,97.3 78.4,98 77.4,98.6 22.5,99 25.5,99 28.5,99 31.5,99 34.5,99 37.5,99 42,99 43.5,99 46.5,99 49.5,99 52.5,99 64.5,99 109.5,99 118.5,99 121.5,99 124.5,99 127.5,99 133.5,99 136.5,99 139.5,99 142.5,99 145.5,99 148.5,99 151.5,99 154.5,99 157.5,99 163.5,99 166.5,99 169.5,99 172.5,99 175.5,99 178.5,99 76.3,99.1 75.2,99.6 57.5,99.9 74,100.1 42,101 57.5,101.9 27,102 30,102 33,102 36,102 54,102 69,102 117,102 129,102 132,102 135,102 147,102 150,102 153,102 156,102 159,102 162,102 165,102 168,102 171,102 174,102 177,102 145.5,102.1 57.5,103.9 43.5,105 46.5,105 49.5,105 109.5,105 112.5,105 115.5,105 118.5,105 121.5,105 124.5,105 127.5,105 133.5,105 139.5,105 142.5,105 145.5,105 148.5,105 151.5,105 154.5,105 157.5,105 160.5,105 163.5,105 166.5,105 169.5,105 172.5,105 175.5,105 178.5,105 100.9,105.1 27,108 30,108 33,108 36,108 42,108 45,108 99,108 108,108 111,108 147,108 150,108 153,108 156,108 159,108 162,108 165,108 168,108 171,108 174,108 177,108 145.5,109.1 84.9,110.1 22.5,111 25.5,111 28.5,111 31.5,111 34.5,111 37.5,111 40.5,111 43.5,111 55.5,111 58.5,111 61.5,111 64.5,111 67.5,111 70.5,111 76.5,111 79.5,111 82.5,111 85.5,111 88.5,111 106.5,111 112.5,111 136.5,111 139.5,111 142.5,111 145.5,111 154.5,111 157.5,111 160.5,111 163.5,111 166.5,111 169.5,111 172.5,111 175.5,111 178.5,111 21,114 24,114 27,114 30,114 33,114 36,114 39,114 42,114 57,114 60,114 63,114 66,114 69,114 75,114 78,114 81,114 105,114 114,114 117,114 120,114 123,114 126,114 129,114 132,114 135,114 138,114 141,114 144,114 156,114 159,114 162,114 165,114 168,114 171,114 174,114 177,114 22.5,117 25.5,117 28.5,117 31.5,117 34.5,117 37.5,117 40.5,117 43.5,117 55.5,117 58.5,117 61.5,117 64.5,117 76.5,117 79.5,117 85.5,117 88.5,117 97.5,117 100.5,117 103.5,117 106.5,117 109.5,117 112.5,117 115.5,117 118.5,117 121.5,117 124.5,117 127.5,117 130.5,117 133.5,117 136.5,117 139.5,117 142.5,117 157.5,117 160.5,117 163.5,117 166.5,117 169.5,117 172.5,117 175.5,117 178.5,117
NetC24_1: C24.1 U2.10 | length 2.2
  Top Layer w0.3: U2.10 88.079,60.204 88.175,60.3 C24.1@88.175,61.8
NetC25_2: C25.2 U1.48 | length 2
  Top Layer w0.3: U1.48 C25.2@99.975,104.7
NetC26_2: C26.2 U1.73 | length 2
  Top Layer w0.3: U1.73 C26.2
NetC27_1: C27.1 U2.2 | length 1.8
  Top Layer w0.3: C27.1 83.921,59.696 U2.2
NetC29_1: C29.1 U2.6 | length 4.1
  Top Layer w0.3: U2.6 87.996,58.204 88.6,57.6 C29.1
NetC29_2: C29.2 L1.1 Q1.1 Q2.3 U2.8 | length 6
  Top Layer w0.3: U2.8 C29.2@90.904,59.204
  Top Layer w0.4: C29.2 92.4,60.7 Q2.3@92.4,61.4 ; Q2.3@94.541,63.041 Q2.3@94.541,63.4
NetC30_1: C30.1 R7.1 | length 1.1
  Top Layer w0.4: C30.1 R7.1
NetC30_2: C30.2 C36.2 R8.1 R10.2 R12.1 U2.5 | length 10.7
  Top Layer w0.3: C36.2 83.599,57.075 84.025,57.501 84.025,57.925 84.296,58.196 U2.5
  Top Layer w0.4: R8.1 79.475,58.175 79.3,58 79.3,56.3 79.425,56.175 R10.2 C30.2 81.1,55.5 81.3,55.3 83.1,55.3 83.225,55.425 R12.1 ; R12.1@83.325,56 C36.2@83.325,56.9
NetC35_1: C35.1 C36.1 U2.4 | length 2.7
  Top Layer w0.3: C36.1 84.171,58.696 U2.4
  Top Layer w0.4: C35.1 C36.1
NetC35_2: C35.2 R12.2 | length 1
  Top Layer w0.4: R12.2@82.3,56.075 C35.2
NetC38_1: C38.1 L2.1 U4.2 | length 6
  Bottom Layer w0.3: v1(112.6,85.1) 115,85.1 115.7,85.8 v1(118.3,85.8)
NetC38_2: C38.2 U4.6 | length 1.3
  Top Layer w0.3: U4.6 C38.2@116.65,86.05
NetC42_1: C42.1 R14.1 R15.2 U4.4 | length 3.9
  Top Layer w0.3: U4.4 115.75,84.15 116.225,84.625 R15.2 C42.1
NetC47_1: C47.1 SW3.1 U1.70 | length 27.1
  Top Layer w0.3: SW3.1@73.85,117.9 73.85,108.5 73.85,106.95 74.3,106.5 C47.1 ; v1(86.8,108.3) 86.9,108.3 U1.70
  Bottom Layer w0.3: v1(73.8,108.3) v1(86.8,108.3)
NetC48_1: C48.1 SW2.1 U1.71 | length 28.7
  Top Layer w0.3: C48.1 71.3,106.5 71.55,106.75 v1(71.55,108.25) 71.55,108.5 SW2.1@71.55,117.9
  Bottom Layer w0.3: v1(71.55,108.25) 73.5,106.3 v1(86.4,106.3)
NetD1_A: D1.A R16.1 | length 1.3
  Top Layer w0.4: D1.A R16.1
NetD2_A: D2.A R17.1 | length 1.5
  Top Layer w0.4: D2.A R17.1
NetD3_A: D3.A R18.1 | length 1.5
  Top Layer w0.4: D3.A R18.1
NetD4_A: D4.A R19.1 | length 1.5
  Top Layer w0.4: D4.A R19.1
NetD5_A: D5.A R20.1 | length 1.5
  Top Layer w0.4: D5.A R20.1
NetJ5_1: J5.1 M1.2
NetJ20_1: J20.1 U1.57 | length 8.5
  Top Layer w0.3: U1.57 93.4,110.1 v1(93.6,110.3)
  Bottom Layer w0.3: v1(93.6,110.3) 96.18,112.88 J20.1
NetJ20_2: J20.2 U1.56 | length 10.2
  Top Layer w0.3: U1.56 93.9,109.6 v1(94.6,110.3)
  Bottom Layer w0.3: v1(94.6,110.3) 96.9,112.6 98.3,112.6 98.72,113.02 J20.2
NetJ20_3: J20.3 U1.55 | length 11.8
  Top Layer w0.3: U1.55 94.4,109.1 v1(95.6,110.3)
  Bottom Layer w0.3: v1(95.6,110.3) 97.1,111.8 99.9,111.8 101.26,113.16 J20.3
NetJ20_4: J20.4 U1.54 | length 13.7
  Top Layer w0.3: U1.54 94.9,108.8 96.4,110.3 v1(96.7,110.3)
  Bottom Layer w0.3: v1(96.7,110.3) 97.5,111.1 101.8,111.1 103.8,113.1 J20.4
NetJ20_5: J20.5 U1.53 | length 15.7
  Top Layer w0.3: U1.53 95.4,108.6 96.545,109.745 97.245,109.745 v1(97.8,110.3)
  Bottom Layer w0.3: v1(97.8,110.3) 103.6,110.3 106.34,113.04 J20.5
NetJ20_6: J20.6 U1.52 | length 18.4
  Top Layer w0.3: U1.52 95.9,108.4 96.7,109.2 97.7,109.2 v1(98.1,109.6)
  Bottom Layer w0.3: v1(98.1,109.6) 106.7,109.6 108.88,111.78 J20.6
NetJ20_7: J20.7 U1.51 | length 19.9
  Top Layer w0.3: U1.51 96.4,108.2 96.9,108.7 v1(98.1,108.7)
  Bottom Layer w0.3: v1(98.1,108.7) 98.4,109 108,109 111.42,112.42 J20.7
NetQ1_2: Q1.2 R6.2 | length 4.5
  Top Layer w0.4: R6.2@89.625,58.5 90.535,58.5 90.715,58.68 92.045,58.68 92.25,58.885 92.25,59.55 92.555,59.855 Q1.2
NetQ2_2: Q2.2 R9.2 | length 2.6
  Top Layer w0.3: R9.2 90.325,60.6 90.65,60.6 Q2.2
NetR6_1: R6.1 U2.7 | length 1.4
  Top Layer w0.3: U2.7 88.571,58.704 R6.1
NetR9_1: R9.1 R11.2 U2.9 | length 2.7
  Top Layer w0.3: U2.9 R9.1@88.579,59.704 ; R9.1 88.775,60.75 R11.2
NetR17_2: R17.2 U1.86 | length 13.9
  Top Layer w0.3: R17.2 73.725,100.7 U1.86
NetR18_2: R18.2 U1.85 | length 13.6
  Top Layer w0.3: R18.2 73.025,101.2 U1.85
NetR19_2: R19.2 U1.84 | length 13.4
  Top Layer w0.3: R19.2 72.325,101.7 U1.84
NetR20_2: R20.2 U1.83 | length 13.1
  Top Layer w0.3: R20.2 71.625,102.2 U1.83
PWM_FL: J1.5 R1.1 U1.39 | length 75.4
  Top Layer w0.3: U1.39 110.8,100.2 120.6,90.4 140,90.4 142.6,87.8 142.6,71 J1.5
  Bottom Layer w0.3: R1.1@143.733,66.9 J1.5
PWM_FR: J2.5 R2.1 U1.41 | length 84.2
  Top Layer w0.3: U1.41 111.3,101.2 119,93.5 146.5,93.5 149.1,90.9 149.1,71.467 J2.5
  Bottom Layer w0.3: R2.1@150.736,66.9 J2.5
PWM_RL: J6.5 R3.1 U1.43 | length 93
  Top Layer w0.3: U1.43 111.7,102.2 117.4,96.5 152.9,96.5 156.1,93.3 156.1,71.433 J6.5
  Bottom Layer w0.3: R3.1@157.714,66.9 J6.5
PWM_RR: J7.5 R4.1 U1.44 | length 100.3
  Top Layer w0.3: U1.44 111.9,102.7 116.5,98.1 158.4,98.1 163.2,93.3 163.2,71.3 J7.5
  Bottom Layer w0.3: R4.1@164.692,66.9 J7.5
QUADSPI_BK1_IO0: U1.58 U3.5 | length 18.2
  Top Layer w0.3: v1(92.9,106.3) U1.58
  Bottom Layer w0.3: v1(92.9,106.3) 92.9,99.8 94.4,98.3 v1(103,98.3)
QUADSPI_BK1_IO1: U1.59 U3.2 | length 22.4
  Top Layer w0.3: U1.59 92.4,110.8 93.3,111.7 102.9,111.7 105.535,109.065 U3.2
QUADSPI_BK1_NCS: U1.46 U3.1 | length 14.8
  Top Layer w0.3: U1.46 99.1,103.7 v1(99.4,104) ; U3.1 v1(106.805,107.295)
  Bottom Layer w0.3: v1(99.4,104) 99.4,106.9 100.2,107.7 106.4,107.7 v1(106.805,107.295)
QUADSPI_CLK: U1.36 U3.6 | length 7.9
  Top Layer w0.3: U1.36 99.6,98.7 100.1,99.2 104.2,99.2 104.265,99.135 U3.6
RCC_OSC_IN: C34.2 U1.12 X1.3 | length 7.8
  Top Layer w0.3: C34.2 87.4,88 87.85,87.55 X1.3 89.224,87.55 90.2,88.526 90.2,89.974 89.9,90.274 U1.12
RCC_OSC_OUT: C33.1 U1.13 X1.1 | length 5.7
  Top Layer w0.3: U1.13 90.4,90.8 90.788,90.412 91.188,90.412 91.4,90.2 X1.1 92.275,89.25 C33.1
RF_NE: M1.7 U1.81 | length 46.2
  Top Layer w0.3: M1.7 51,95.9 54,98.9 61.3,98.9 65.6,103.2 U1.81
RF_RST: M1.9 U1.82 | length 29.4
  Top Layer w0.3: M1.9 61.9,93.9 63,95 63,99.4 66.3,102.7 U1.82
SERVO_PWM1: J12.3 U1.66 | length 68.8
  Top Layer w0.3: v1@88.6,108.8 88.9,108.5 U1.66
  Bottom Layer w0.3: J12.3 53.4,61.1 53.9,61.6 53.9,72.5 64.9,83.5 70.6,83.5 88.9,101.8 88.9,108.5 v1(88.6,108.8)
SERVO_PWM2: J11.3 U1.65 | length 78.9
  Top Layer w0.3: v1(89.1,109.3) 89.4,109 U1.65
  Bottom Layer w0.3: J11.3 46.266,60 54.2,60 54.5,60.3 54.5,72.3 65.1,82.9 70.7,82.9 89.4,101.6 89.4,109 v1(89.1,109.3)
SERVO_PWM3: J10.3 U1.64 | length 87.1
  Top Layer w0.3: J10.3 39.283,60 54.2,60 v1(55.1,60.9) ; v1(89.6,109.8) 89.9,109.499 U1.64
  Bottom Layer w0.3: v1(55.1,60.9) 55.1,72.1 65.3,82.3 70.8,82.3 89.9,101.4 89.9,109.5 v1(89.6,109.8)
SERVO_PWM4: J16.3 U1.63 | length 88.3
  Top Layer w0.3: v1(55.8,60.9) 56.7,60 71.949,60 J16.3 ; v1(90.1,110.3) 90.4,110 U1.63
  Bottom Layer w0.3: v1(55.8,60.9) 55.8,72 65.5,81.7 70.9,81.7 90.4,101.2 90.4,110 v1(90.1,110.3)
SERVO_PWM5: J15.3 U1.62 | length 81.9
  Top Layer w0.3: v1(90.6,110.8) 90.9,110.499 U1.62
  Bottom Layer w0.3: J15.3 64.966,60 56.7,60 56.4,60.3 56.4,71.8 65.7,81.1 71,81.1 90.9,101 90.9,110.5 v1(90.6,110.8)
SERVO_PWM6: J13.3 U1.61 | length 73.5
  Top Layer w0.3: v1(91.1,111.3) 91.4,111 U1.61
  Bottom Layer w0.3: J13.3 57.6,61.1 57,61.7 57,71.5 66,80.5 71.1,80.5 91.4,100.8 91.4,111 v1(91.1,111.3)
SPEED_FL: J1.3 U1.22 | length 67.8
  Top Layer w0.3: U1.22 94.9,90.9 96,89.8 117.1,89.8 120.1,86.8 139.3,86.8 140.7,85.4 v1(141.9,85.4) ; v1(145,85.4) 145,73.6 J1.3
  Bottom Layer w0.3: v1(141.9,85.4) v1(145,85.4)
SPEED_FR: J2.3 U1.23 | length 74.6
  Top Layer w0.3: U1.23 95.4,91.1 96.2,90.3 117.4,90.3 120.4,87.3 139.7,87.3 140.9,86.1 v1(141.9,86.1) ; v1(152,86.1) 152,73.567 J2.3
  Bottom Layer w0.3: v1(141.9,86.1) v1(152,86.1)
SPEED_RL: J6.3 U1.24 | length 81.4
  Top Layer w0.3: U1.24 95.9,91.3 96.4,90.8 117.7,90.8 120.7,87.8 140.1,87.8 141.1,86.8 v1(141.9,86.8) ; v1(159,86.8) 159,73.533 J6.3
  Bottom Layer w0.3: v1(141.9,86.8) v1(159,86.8)
SPEED_RR: J7.3 U1.25 | length 88.2
  Top Layer w0.3: U1.25 96.4,91.5 96.6,91.3 117.9,91.3 120.9,88.3 140.4,88.3 141.1,87.6 v1(141.9,87.6) ; v1(165.9,87.6) 165.9,73.6 J7.3
  Bottom Layer w0.3: v1(141.9,87.6) v1(165.9,87.6)
SPI1_MISO: J8.4 J9.4 U1.30 | length 37.9
  Top Layer w0.3: U1.30 101.7,95.7 v1(101.8,95.8)
  Bottom Layer w0.3: v1(101.8,95.8) 122.3,95.8 125.54,99.04 J9.4 J8.4
SPI1_MOSI: J8.2 J9.2 U1.31 | length 32.7
  Top Layer w0.3: U1.31 101,96.2 v1(101.2,96.4)
  Bottom Layer w0.3: v1(101.2,96.4) 117.9,96.4 120.54,99.04 J9.2 J8.2
SPI1_NE1: J8.8 U1.32 | length 49
  Top Layer w0.3: U1.32 100.4,96.7 v1(100.7,97)
  Bottom Layer w0.3: v1(100.7,97) 111.2,97 114.6,100.4 114.6,108 117.3,110.7 132.789,110.7 J8.8
SPI1_NE2: J9.8 U1.33 | length 59.4
  Top Layer w0.3: U1.33 99.8,97.2 v1(100.2,97.6)
  Bottom Layer w0.3: v1(100.2,97.6) 109.9,97.6 113.3,101 113.3,108.7 116.3,111.7 134.7,111.7 136.8,109.6 136.8,102.226 J9.8
SPI1_SCK: J8.6 J9.6 U1.29 | length 43.1
  Top Layer w0.3: U1.29 v1(102.3,95.2)
  Bottom Layer w0.3: v1(102.3,95.2) 126.7,95.2 130.54,99.04 J9.6 J8.6
SPI3_MISO: M1.5 U1.79 | length 44.9
  Top Layer w0.3: M1.5 49.6,99.9 52.6,102.9 63.1,102.9 64.4,104.2 U1.79
SPI3_MOSI: M1.6 U1.80 | length 45.6
  Top Layer w0.3: M1.6 50.4,97.9 53.4,100.9 62.2,100.9 65,103.7 U1.80
SPI3_SCK: M1.4 U1.78 | length 44.5
  Top Layer w0.3: M1.4 48.5,101.9 51.5,104.9 63.6,104.9 63.8,104.7 U1.78
SPI6_MISO: J3.4 J4.4 U1.90 | length 48.9
  Top Layer w0.3: J4.4 J3.4 48.555,86.655 49.7,87.8 67.4,87.8 78.3,98.7 U1.90
SPI6_MOSI: J3.2 J4.2 U1.91 | length 43.2
  Top Layer w0.3: J4.2 J3.2 53.555,85.755 54.4,86.6 67.9,86.6 79.5,98.2 U1.91
SPI6_NE1: J3.8 U1.88 | length 53
  Top Layer w0.3: J3.8 38.555,87.755 40.8,90 66.4,90 76.1,99.7 U1.88
SPI6_NE2: J4.8 U1.87 | length 62.5
  Top Layer w0.3: J4.8 37.3,78.306 37.3,88.7 39.7,91.1 65.9,91.1 75,100.2 U1.87
SPI6_SCK: J3.6 J4.6 U1.89 | length 54.6
  Top Layer w0.3: J4.6 J3.6 43.555,87.555 44.9,88.9 66.9,88.9 77.2,99.2 U1.89
SYS_BOOT0: R13.2 U1.94 | length 1.8
  Top Layer w0.3: R13.2 U1.94
SYS_NRST: C19.2 J17.5 R5.1 SW1.1 U1.14 | length 50.3
  Top Layer w0.3: SW1.1@81.6,81.05 SW1.1@91,81.05 ; v1@90.9,93.1 U1.14 90.9,91.364 91.464,90.8 91.876,90.8 C19.2@93.001,89.675 ; SW1.1@91.75,81.05 93.9,83.2 93.9,89.675 ; C19.2 93.9,89.675 ; R5.1 94.225,89.675 93.9,89.675
  Bottom Layer w0.3: v1(90.9,93.1) 91.945,94.145 91.945,117.9 J17.5
USART1_RX: J14.1 U1.69 | length 7.6
  Top Layer w0.3: U1.69 87.4,112.1 88.06,112.76 J14.1
USART1_TX: J14.2 U1.68 | length 8.8
  Top Layer w0.3: U1.68 87.9,111.4 89.2,112.7 89.8,112.7 90.6,113.5 J14.2
pads on no net: J17.4 J18.0 J19.0 J21.1 J21.2 J21.3 J21.4 M1.8 M1.10 M1.11 M1.12 M1.13 M1.14 M1.15 U1.1 U1.2 U1.3 U1.4 U1.5 U1.6 U1.7 U1.8 U1.9 U1.15 U1.16 U1.17 U1.18 U1.28 U1.34 U1.35 U1.37 U1.47 U1.60 U1.67 U1.77 U1.92 U1.93 U1.95 U1.96 U1.97 U1.98 U2.3 U3.3 U3.7

## Polygon pours and split planes (outlines as drawn)
GND on Top Layer "g" (solid, remove dead copper, pour order 10): 180,120 180,40 144,40 144,48 56,48 56,40 20,40 20,120
NetC29_2 on Top Layer "g" (solid, remove dead copper, pour order 6): 88.1,70.5 88.1,66.3 92.2,66.3 92.2,65.7 97.6,65.7 97.6,70.5
BAT_PWR on Top Layer "g" (solid, remove dead copper, pour order 8): 92.7,59.2 92.7,53.8 97.5,53.8 138.3,53.8 141.4,56.9 169,56.9 169,65.3 133.1,65.3 133.1,80.8 124.5,80.8 124.5,66.9 124.5,66.2 123.8,66.2 113.6,66.2 113.6,80.5 104,80.5 104,65 104,59.2
GND on Bottom Layer "g" (solid, remove dead copper, pour order 9): 180,120 180,40 144,40 144,48 56,48 56,40 20,40 20,120
BAT_PWR on Bottom Layer "g" (solid, remove dead copper, pour order 7): 92.7,59.2 92.7,53.8 97.5,53.8 138.3,53.8 141.4,56.9 169,56.9 169,65.3 133.1,65.3 133.1,80.8 124.5,80.8 124.5,66.2 113.6,66.2 113.6,80.5 104,80.5 104,65 104,59.3 104,59.2

## Keep-outs
Keep-Out Layer:
  circle w0.254: c50,45 r5
  circle w0.254: c50,115 r5
  circle w0.254: c150,115 r5
  circle w0.254: c150,45 r5
  lines w0.2: 20,40 20,120 180,120 180,40 144,40 144,48 56,48 56,40 20,40

## Other copper
Top Layer:
  rectangle net GND: 20.3,106.6 41.3,109.1
  rectangle net GND: 20.3,103.2 41.3,105.2
  rectangle net 3V3: 84.4,93.7 96.1,105.7
  rectangle net NetJ5_1: 20.7,105.4 40.6,106.4
  rectangle net 7V4: 74.7,64.5 81.9,70.5
  rectangle net 7V4: 79.4,58.7 81.5,63
  rectangle net 7V4: 36.9,62.4 81.5,70.5
  rectangle net NetC29_2: 93.9,59.4 97.6,65.8
  rectangle net BAT_PWR: 90.3,53.4 94.2,56.4
  rectangle net 3V3: 101.2,81.8 105.5,85.4
  rectangle net NetC38_1: 109,84.7 113.1,85.4
  rectangle net BAT_PWR: 112,78.5 113.2,84.5
  rectangle net 3V3: 93.7,91.2 94.6,93.7
  pour cut-out: 20.6,106.6 20.6,105.2 20,105.2 20,106.6
  pour cut-out: 40.6,106.6 40.6,105.2 41.6,105.2 41.6,106.6
Bottom Layer:
  rectangle net 3V3: 101.2,81.8 104,93.3
  rectangle net 7V4: 36.9,62.4 53.1,70.5
  rectangle net 7V4: 58.1,62.4 75.5,70.5

## Silkscreen, mask and mechanical layers (free items; w line width, h text height)
Top Overlay:
  circle w0.254: c50,45 r5
  circle w0.254: c50,115 r5
  circle w0.254: c150,115 r5
  circle w0.254: c150,45 r5
  text "202005132239" at 23,45.8 h1.52
Bottom Solder:
  rectangle: 36.9,62.4 53.1,70.5
  rectangle: 58.1,62.4 75.5,70.5
  rectangle: 93.1,54.4 137.7,59
  rectangle: 107.5,63.2 112.9,78.4
  rectangle: 105.2,57.8 169,65.3
  rectangle: 126.9,58.6 132.5,78.5
Mechanical 1:
  circle w0.2: c150,115 r1.55
  circle w0.2: c50,115 r1.55
  circle w0.2: c50,45 r1.55
  circle w0.2: c150,45 r1.55
  lines w0.2: 20,40 20,120 180,120 180,40 144,40 144,48 56,48 56,40 20,40